# Altium PCB Finalized_21.PcbDoc
Units mm, origin at the board's own origin, x right, y up, seen from the top; angles counter-clockwise.
Board outline 52.7 x 58.93 mm, 2 copper layers (Top Layer, Bottom Layer); 11 components, 13 nets, 61 pads, 3 vias.
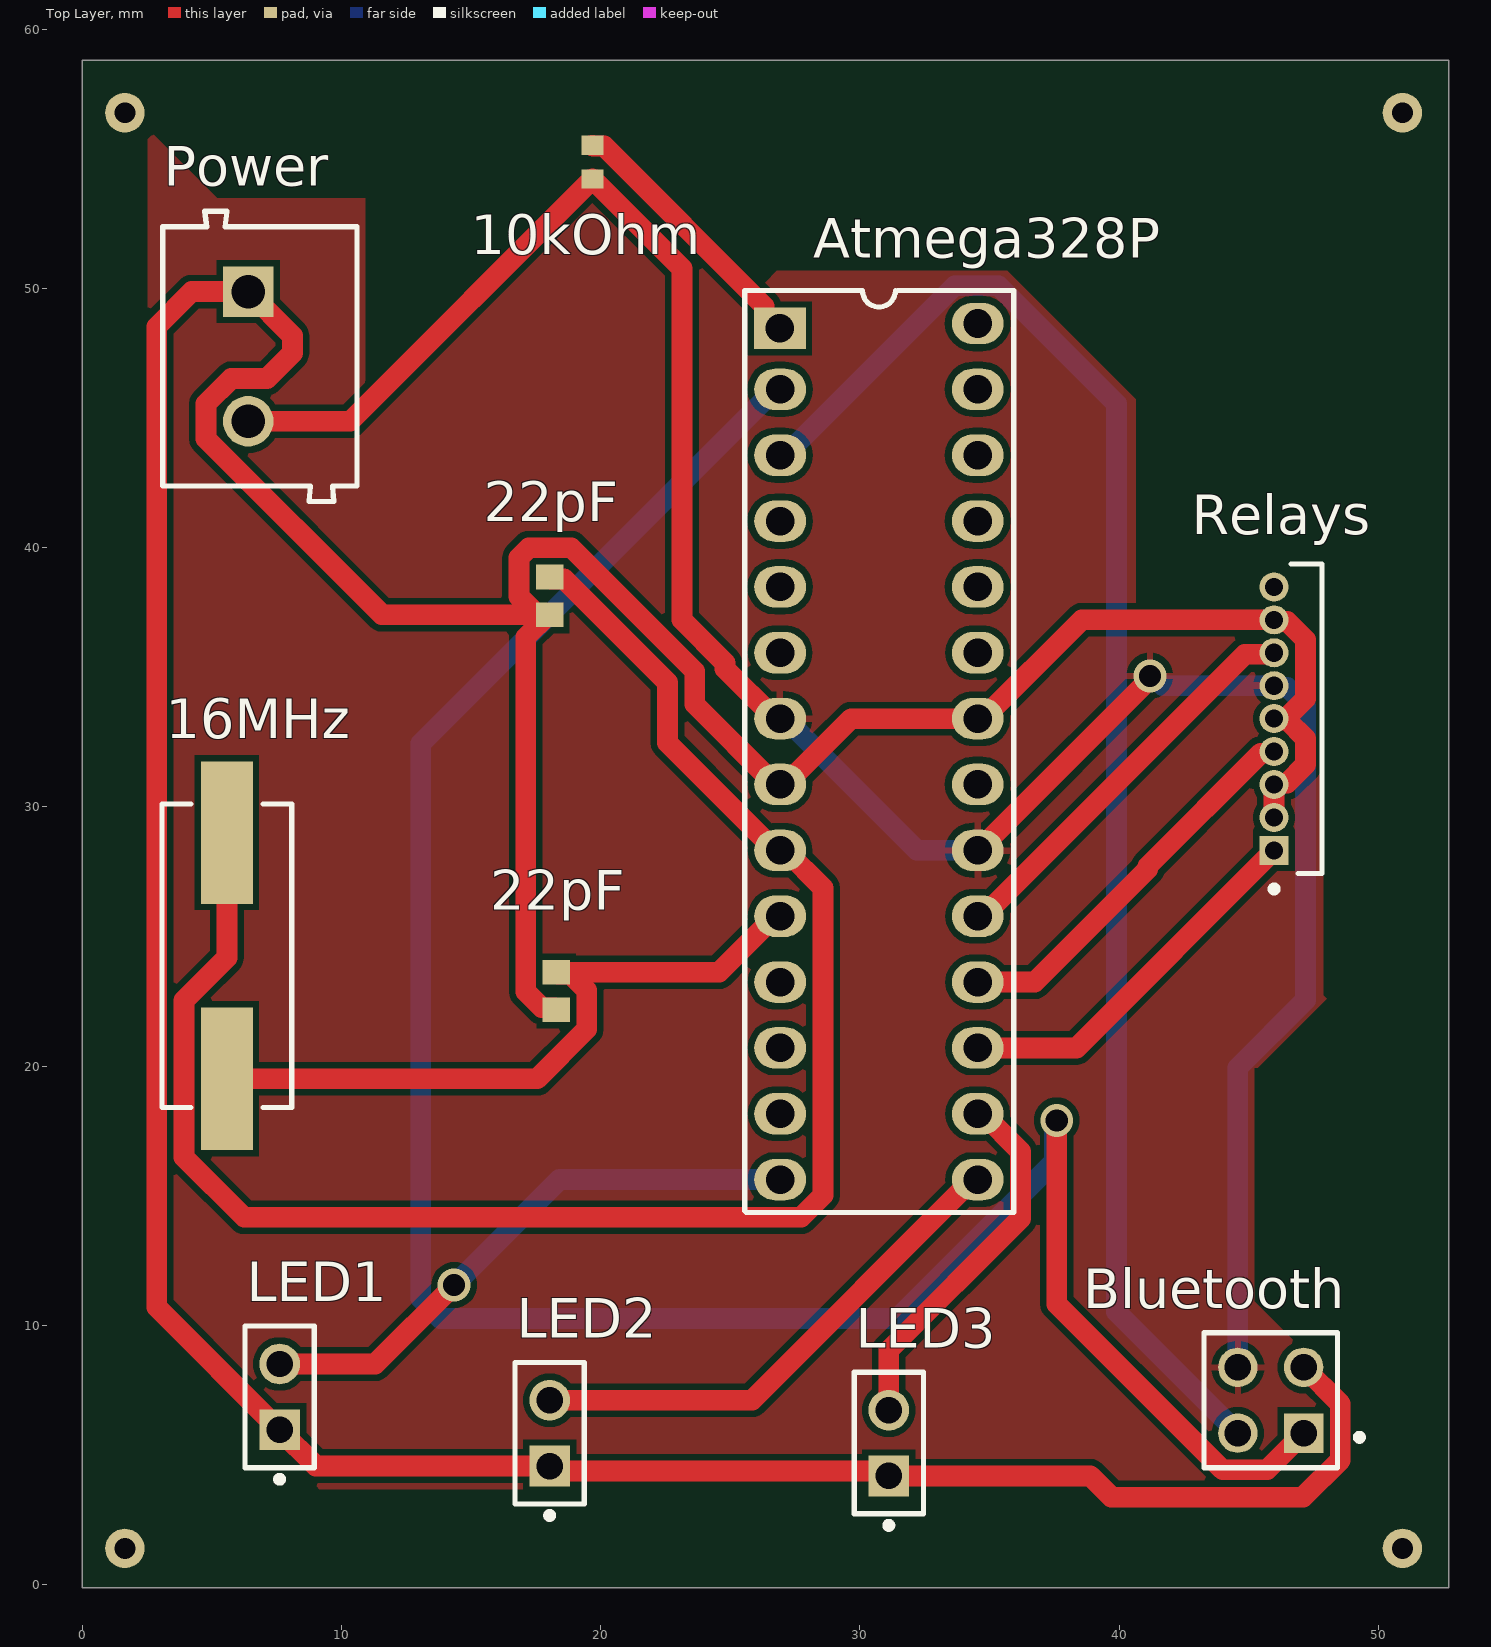
[diagram p0: Top Layer view]
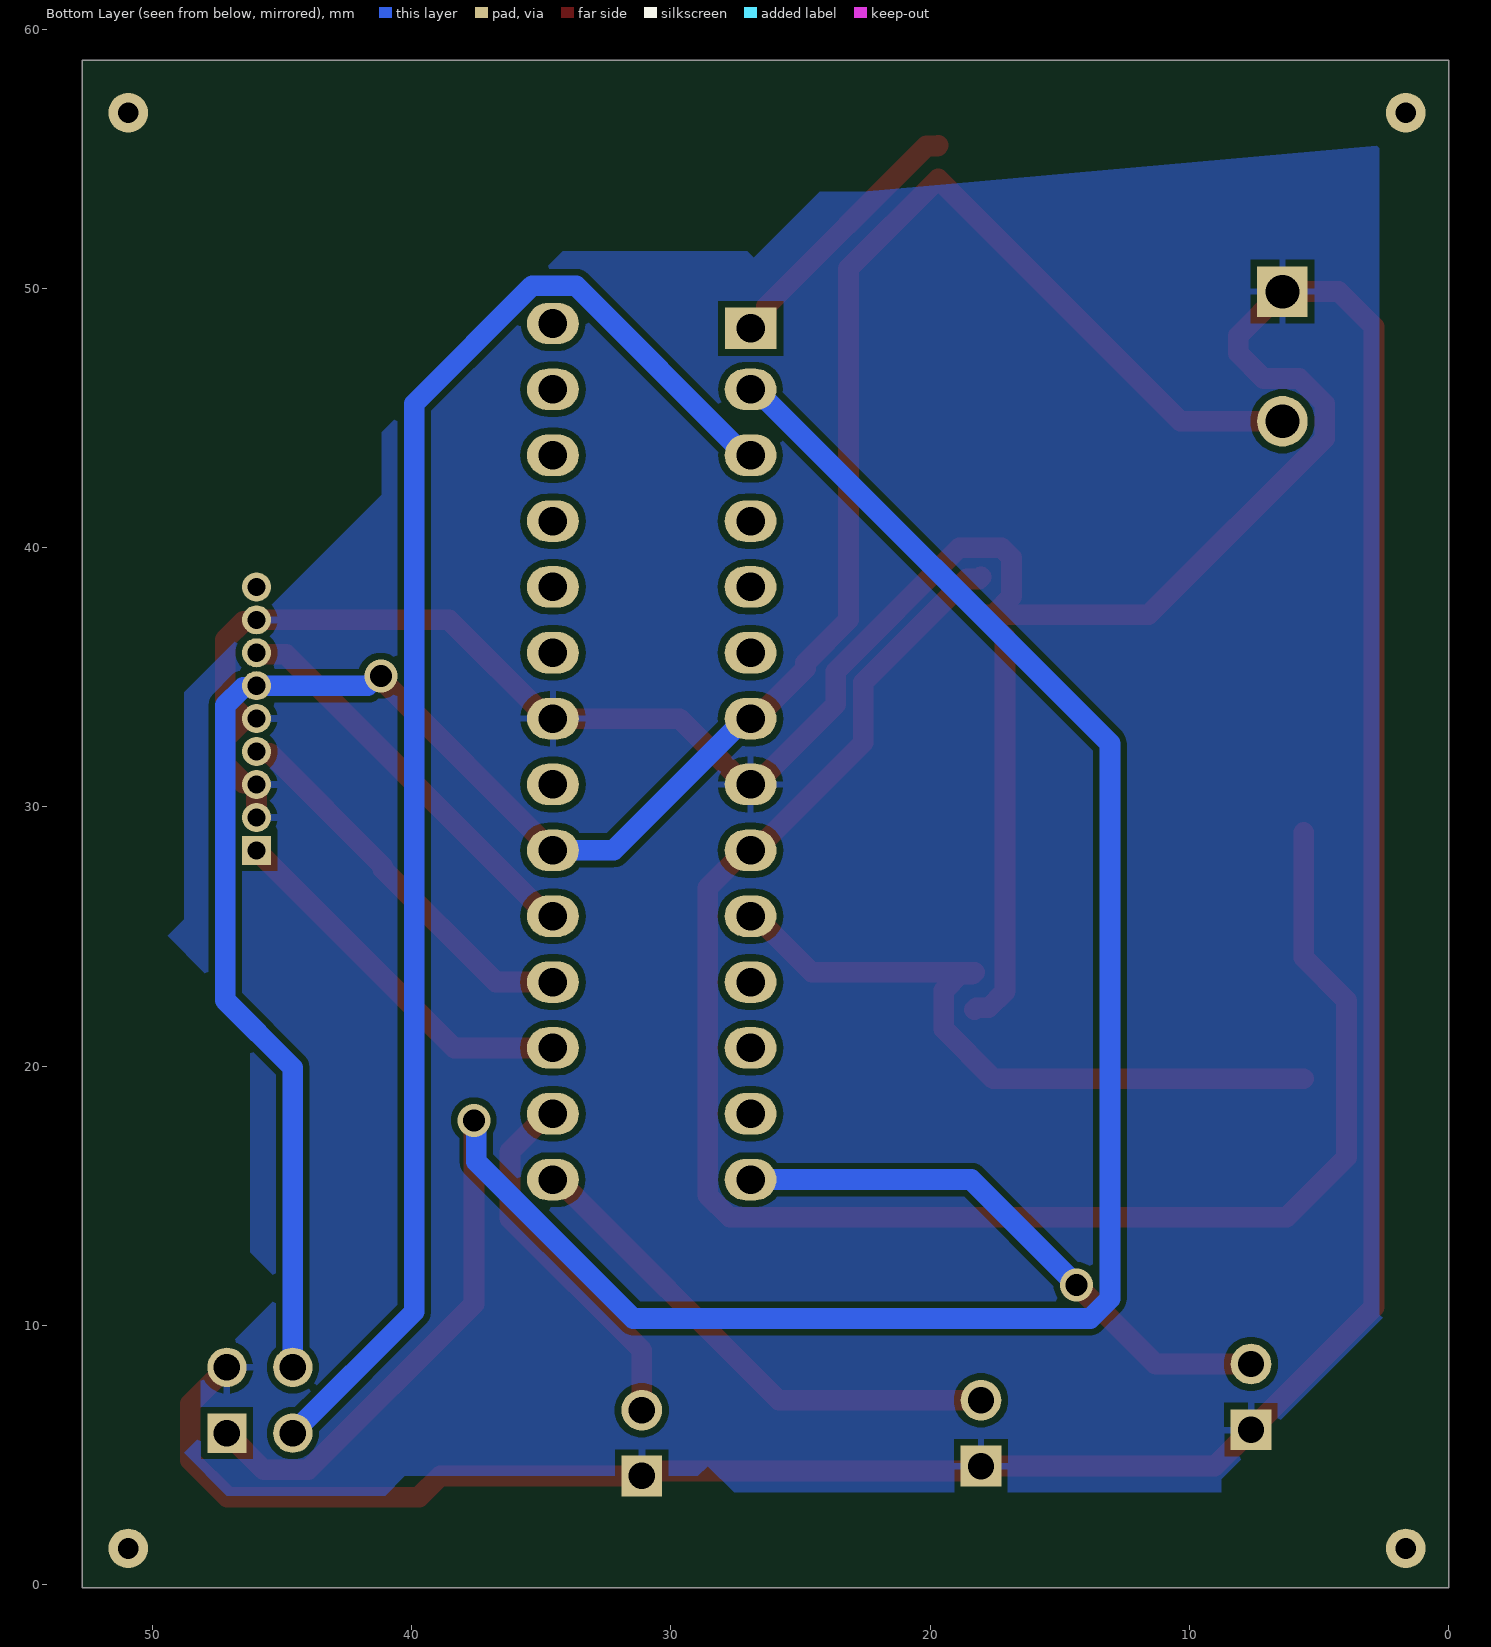
[diagram p1: Bottom Layer view, seen from below]
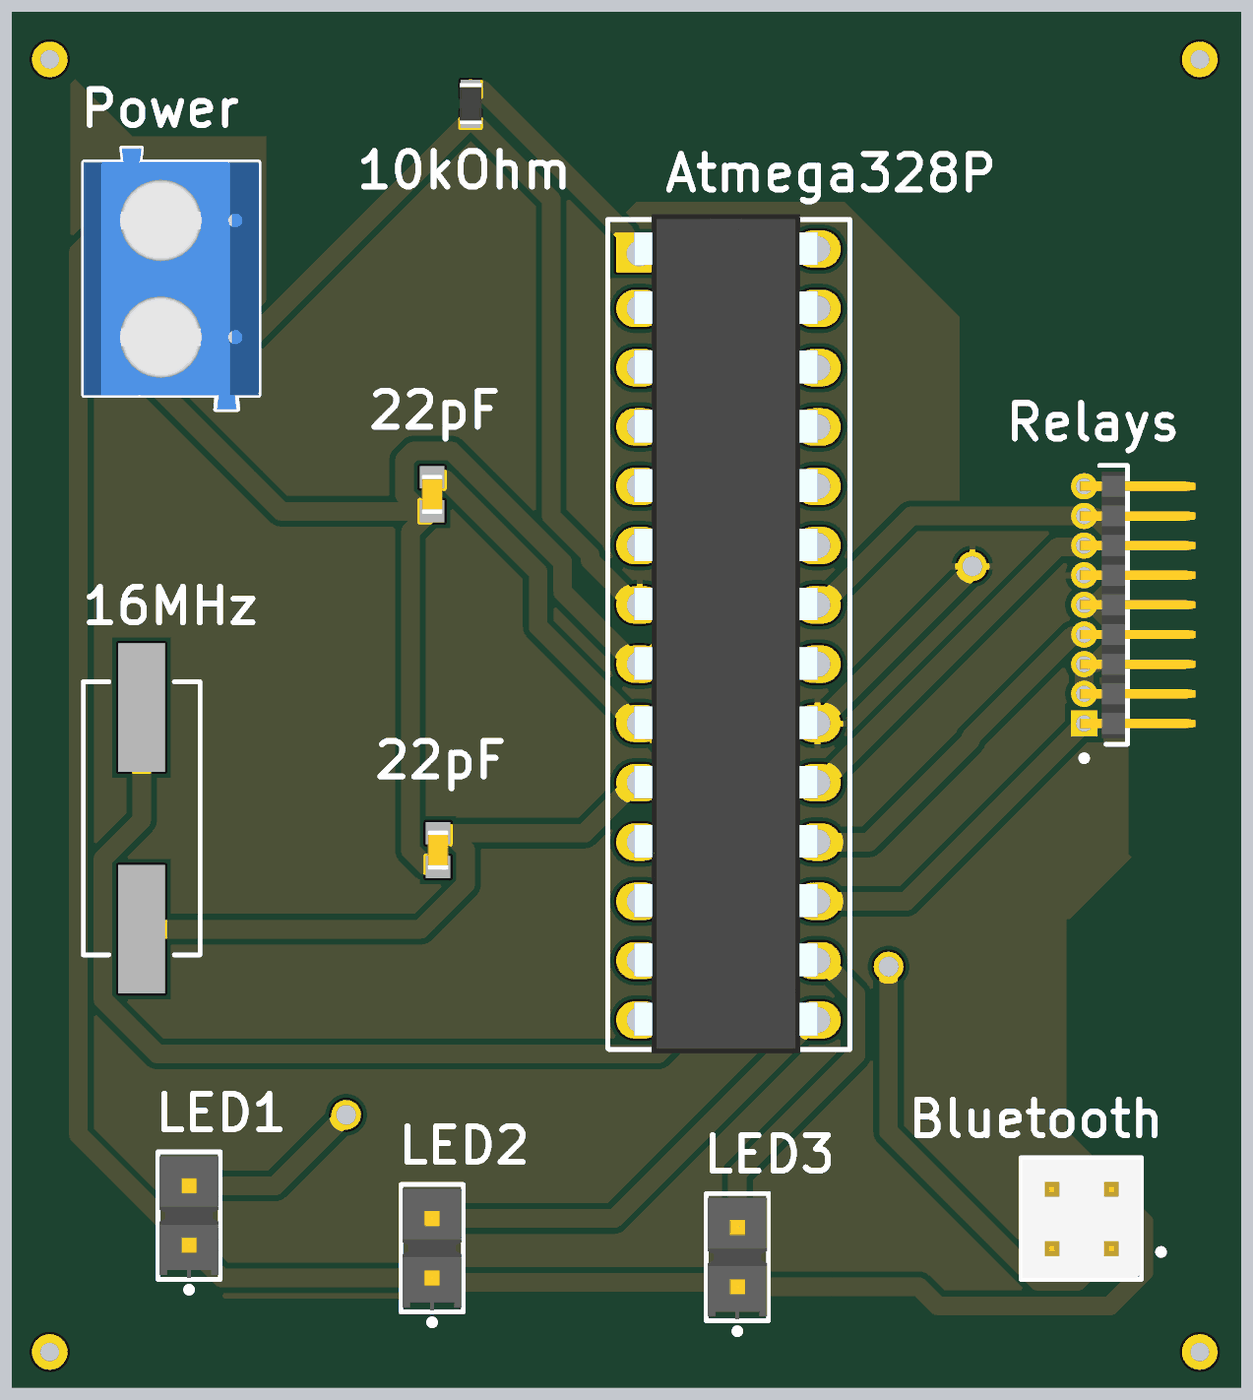
[diagram p2: 3D render of the assembled board from above, using the file's embedded part models]

## Layer stack, top to bottom
Top Solder: solder mask 0.0102, Solder Resist, Dk 3.5
Top Layer: signal copper 0.0356
Dielectric 1: dielectric 0.32, FR-4, Dk 4.8
Bottom Layer: signal copper 0.0356
Bottom Solder: solder mask 0.0102, Solder Resist, Dk 3.5

## Board outline
0,-0.127 52.705,-0.127 52.705,58.801 0,58.801

## Design rules (kind name [scope] priority, off if disabled: settings)
Clearance [All] p1: gap=0.254 ignorepadtopadclearanceinfootprint=FALSE except(0: Arc-Hole Track-Hole SMDPad-Hole THPad-Hole Via-Hole Fill-Hole Poly-Hole Region-Hole Text-Hole)
PolygonConnect [All] p1: connectstyle=Relief reliefconductorwidth=0.254 reliefentries=4 polygonreliefangle="90 Angle" airgapwidth=0.254
RoutingVias [All] p1: holewidth=1 width=1.27 viastyle="Through Hole" minholewidth=0.8 minwidth=1.27 maxholewidth=0.85 maxwidth=1.27
SolderMaskExpansion [All] p1: expansion=0.102 istentingtop=FALSE
Width [All] p1: maxlimit=1 minlimit=0.8 preferedwidth=0.8 minimp=50.000000 maximp=50.000000 favimp=50.000000
30 further rules are at their usual default settings.

## Classes and differential pairs
component class Finalized: 16MHz 22pF Bluetooth LED1 LED2 LED3 Power Relays

## Components (designator, comment, footprint, x,y, rotation, side; value= is the part's Value field where it differs from the comment)
10kOhm "ERJ3EKF1002V" RESC1609X55X30LL15T15 19.685,54.864 r90 top
16MHz "FOXSDLF/160-20" FOX-FOXSDLF160-20_V 5.588,24.257 r90 top
22pF "GRM1885C1H220JA01D" CAPC1608X90X35ML10T15 18.034,38.137 r90 top
22pF "GRM1885C1H220JA01D" CAPC1608X90X35ML10T15 18.288,22.897 r90 top
Atmega328P "ATMEGA328P-PU" 27_DIP_7.62mm 26.914,48.451 r0 top
Bluetooth "HTSW-102-07-G-D" FP-HTSW-102-07-G-D-MFG 45.847,7.112 r90 top
LED1 "TSW-102-07-F-S" FP-TSW-102-07-F-S-MFG 7.62,7.239 r90 top
LED2 "TSW-102-07-F-S" FP-TSW-102-07-F-S-MFG 18.034,5.842 r90 top
LED3 "TSW-102-07-F-S" FP-TSW-102-07-F-S-MFG 31.115,5.461 r90 top
Power "691102710002" 691102710002 6.858,47.371 r270 top
Relays "GRPB091VWCN-RC" FP-GRPB091VWCN-RC-MFG 47.231,33.401 r90 top

## Footprints (in the part's own frame and the unit in brackets; to place one, negate y for a bottom-side part, rotate by r counter-clockwise, add the part's x,y. Pads: shape width x height; smd on the part's side, far side on the other; paste and mask are expansions set on the pad)
27_DIP_7.62mm [mm]
  rect 2x1.6 hole 1.1: 1(0,0)
  oval 2x1.6 hole 1.1: 2(0.01,-2.35) 3(0.01,-4.89) 4(0.01,-7.43) 5(0.01,-9.97) 6(0.01,-12.51) 7(0.01,-15.05) 8(0.01,-17.59) 9(0.01,-20.13) 10(0.01,-22.67) 11(0.01,-25.21) 12(0.01,-27.75) 13(0.01,-30.29) 14(0.01,-32.83) 15(7.63,-32.83) 16(7.63,-30.29) 17(7.63,-27.75) 18(7.63,-25.21) 19(7.63,-22.67) 20(7.63,-20.13) 21(7.63,-17.59) 22(7.63,-15.05) 23(7.63,-12.51) 24(7.63,-9.97) 25(7.63,-7.43) 26(7.63,-4.89) 27(7.63,-2.35) 28(7.63,0.19)
  silkscreen extent -1.35,-34.1 9.02,1.46, body extent -0.23,-34.26 7.65,1.68, height 4.65
691102710002 [mm] "5,00mm - modular - blue - Horizontal entry with pressure clamp - 9,9 mm height - 02p"
  rect 1.95x1.95 hole 1.3: 1(-2.5,-0.45)
  round 1.95 hole 1.3: 2(2.5,-0.45)
  silkscreen extent -5.6,-3.75 5.6,3.75, body extent -5.6,-3.75 5.6,3.75, height 9.96
CAPC1608X90X35ML10T15 [mm] "Chip Capacitor, 2-Leads, Body 1.7x0.9mm, IPC Low Density"
  rect 0.95x1.05 smd: 1(-0.725,0) 2(0.725,0)
  body extent -0.85,-0.45 0.85,0.45, height 0.9
FOX-FOXSDLF160-20_V [mm] "SMD, 2-Leads, Body 5x11.7mm, Height 4.5mm"
  rect 5.5x2 smd: 1(-4.75,0) 2(4.75,0)
  silkscreen extent -5.85,-2.5 5.85,2.5, body extent -5.85,-2.5 5.85,2.5, height 4.5
FP-GRPB091VWCN-RC-MFG [mm]
  rect 1.12x1.12 hole 0.7 paste-1000 mask+0: 1(-5.08,1.257)
  round 1.12 hole 0.7 paste-1000 mask+0: 2(-3.81,1.257) 3(-2.54,1.257) 4(-1.27,1.257) 5(0,1.257) 6(1.27,1.257) 7(2.54,1.257) 8(3.81,1.257) 9(5.08,1.257)
  silkscreen extent -6.69,-0.6 5.97,1.38, body extent -6.07,-3.9 6.07,1.92, height 0.25
FP-HTSW-102-07-G-D-MFG [mm]
  rect 1.52x1.52 hole 1.02 paste-1000 mask+0: 1(-1.27,-1.27)
  round 1.52 hole 1.02 paste-1000 mask+0: 2(-1.27,1.27) 3(1.27,-1.27) 4(1.27,1.27)
  silkscreen extent -2.6,-3.55 2.6,2.58, body extent -2.7,-2.68 2.7,2.68, height 0.25
FP-TSW-102-07-F-S-MFG [mm]
  rect 1.57x1.57 hole 1.02 paste-1000 mask+0: 1(-1.27,0)
  round 1.57 hole 1.02 paste-1000 mask+0: 2(1.27,0)
  silkscreen extent -3.3,-1.34 2.73,1.34, body extent -2.83,-1.44 2.83,1.44, height 0.25
RESC1609X55X30LL15T15 [mm] "Chip Resistor, 2-Leads, Body 1.75x0.95mm, IPC High Density"
  rect 0.75x0.85 smd: 1(-0.65,0) 2(0.65,0)
  body extent -0.87,-0.48 0.87,0.48, height 0.55

## Part data
10kOhm: library part CMP-1012-00623-3, "Chip Resistor, 10 KOhm, +/- 1%, 0.1 W, -55 to 155 degC, 0603 (1608 Metric), RoHS, Tape and Reel", Case Code (Imperial)=0603, Case Code (Metric)=1608, Manufacturer=Panasonic, Max Operating Temperature=155degC, Max Power Dissipation=100mW, Min Operating Temperature=-55degC, Package Description="2-Pin Surface Mount Device, Body 1.6 x 0.85 mm", Package Quantity=1, Package Reference=603, Resistance=10KOhm, Temperature Coefficient=100ppm\/degreesC, Tolerance=1%, Voltage Rating=75V, Case\/Package=0603, Composition=ThickFilm, Contact Plating=Tin, Datasheet URL=https://industrial.panasonic.com/cdbs/www-data/pdf/RDA0000/AOA0000C304.pdf, Datasheet Version=02/2017, Depth=0.8mm, Height=0.45mm, Lead Free=LeadFree, Length=1.6mm, Manufacturer URL=http://www.panasonic.com/, Military Standard=Not, Mount=SurfaceMount, Mounting Technology=SurfaceMount, Number of Pins=2, Number of Terminations=2, Packaging=TapeandReel, Power Rating=100mW, Radiation Hardening=No, REACH SVHC=NoSVHC, RoHSCompliant=true, Termination=SMD/SMT, Voltage Rating (DC)=75V, Width=0.031inch
16MHz: library part CMP-1749-00001-1, "Resistance Weld SMD Crystal, 16 MHz, +/- 30 ppm, 20 pF, -20 to 70 degC, 2-Pin SMD, RoHS, Tape and Reel", Case\Package=SOT-553-6, Max Operating Temperature="150 degC", Max Supply Voltage="3.3 V", Max Supply Voltage (DC)="6 V", Min Operating Temperature="-55 degC", Min Supply Voltage="1.4 V", Min Supply Voltage (DC)="4 V", Output Current="3 mA", Package Quantity=1, ComponentLink1Description="Manufacturer URL", ComponentLink1URL=http://www.foxonline.com/, ComponentLink2Description=Datasheet, ComponentLink2URL=http://foxonline.com/pdfs/hc49sdlf.pdf, DatasheetVersion=Mar-15, Height="0.55 mm", Interface=I2C, Length="1.6 mm", Mount="Surface Mount", PackageDescription="2-Pin Surface Mount Device, Body 5 x 11.7 mm, Height 4.5 mm", PackageReference=FOX-FOXSDLF160-20, Packaging="Cut Tape", Pins=6, Radiation Hardening=No, REACH SVHC="No SVHC", RoHSCompliant=true, Weight="9.9E-05 oz", Width="1.2 mm"
22pF 22pF: library part CMP-2000-04945-1, "Chip Capacitor, 22 pF, +/- 5%, 50 V, -55 to 125 degC, 0603 (1608 Metric), RoHS, Tape and Reel", Capacitance=22pF, Case Size/Dimension=0603, Dielectric=C0G, Manufacturer=Murata, Package Description="2-Pin Surface Mount Device, Body 1.6 x 0.8 mm", Package Reference=603, Rated Voltage=50V, Tolerance (%)=±5%, Datasheet URL=https://datasheet.ciiva.com/11786/0900766b807a1cab-11786398.pdf, Datasheet Version=Jul-06, Manufacturer URL=http://www.murata.com/
Atmega328P: "ATMEGA328P-PU; 8 bit Microcontroller AVR 20MHz 1; 32kb Flash; 2kb RAM; I2C SPI 2", Case/Package=PDIP, Frequency=20MHz, Manufacturer="Microchip / Atmel", Max Operating Temperature=85°C, Max Supply Voltage=5.5V, Min Operating Temperature=-40°C, Min Supply Voltage=1.8V, Package Quantity=14, Supplier Part Number 1=ATMEGA328P-PU-ND, Category=Microcontrollers, ComponentLink1Description=https://datasheet.ciiva.com/20168/73-4283-20168380.pdf?src-supplier=Rapid+Electronics, ComponentLink1URL=https://datasheet.ciiva.com/20168/73-4283-20168380.pdf?src-supplier=Rapid+Electronics, ComponentLink2Description=https://datasheet.ciiva.com/19457/2139111-19457070.pdf?src-supplier=Jameco, ComponentLink2URL=https://datasheet.ciiva.com/19457/2139111-19457070.pdf?src-supplier=Jameco, ComponentLink3Description=https://datasheet.ciiva.com/1157/1684409-1157696.pdf?src-supplier=Element14, ComponentLink3URL=https://datasheet.ciiva.com/1157/1684409-1157696.pdf?src-supplier=Element14, ComponentLink4Description=https://datasheet.ciiva.com/26818/atmega328p-pu-26818578.pdf?src-supplier=IIIC, ComponentLink4URL=https://datasheet.ciiva.com/26818/atmega328p-pu-26818578.pdf?src-supplier=IIIC, ComponentLink5Description=https://datasheet.ciiva.com/29119/155197-da-01-en-microcontr-atmega328p-pu-8bit-pdip-28-29119593.pdf?src-supplier=Conrad, ComponentLink5URL=https://datasheet.ciiva.com/29119/155197-da-01-en-microcontr-atmega328p-pu-8bit-pdip-28-29119593.pdf?src-supplier=Conrad, ComponentLink6Description=https://datasheet.ciiva.com/15213/getdatasheetpartid-318533-15213133.pdf?src-supplier=Verical, ComponentLink6URL=https://datasheet.ciiva.com/15213/getdatasheetpartid-318533-15213133.pdf?src-supplier=Verical, Contact Plating=Tin,Matte, Core Architecture=AVR, Data Bus Width=8b, Height=3.28mm, Interface=I2C,SPI,UART,USART,2-Wire, Lead Free="Lead Free", Length=37.4mm, Manufacturer Part Number=ATMEGA328P-PU, Max Frequency=20MHz, Memory Size=32KB, Memory Type=FLASH, Mount="Through Hole", Number of ADC Channels=6, Number of I2C Channels=1, Number of I/Os=23, Number of Pins=28, Number of Programmable I/O=23, Number of PWM Channels=6, Number of SPI Channels=1, Number of Timers/Counters=3, Oscillator Type=Internal, Packaging=Rail/Tube, Peripherals="Brown-out Detect/Reset,POR,PWM,WDT", Pricing 1="1=2,08000, 25=1,91000, 100=1,73000 (USD)", Radiation Hardening=No, RAM Size=2KB, REACH SVHC="No SVHC", RoHS=Yes, Stock 1=5280, Supplier 1=Digi-Key, Watchdog Timer=Yes, Width=6.76mm
Bluetooth: library part CMP-02766-000010-1, "CONN HEADER VERT 4POS 2.54MM", Current Rating=6.3A, Manufacturer=Samtec, Temperature="-55°C to +125°C", Temperature Range High=+125°C, Temperature Range Low=-55°C, Voltage Rating=550V, Automotive=No, Category=Conn, ComponentLink2Description=Datasheet, ComponentLink2URL=http://suddendocs.samtec.com/catalog_english/htsw_th.pdf, Conn Gender=Male, Conn Orientation=Straight, Contact Material=Gold,Nickel, Device Class L1=Connectors, Device Class L2="Headers and Wire Housings", Device Class L3=unset, Digikey Description="CONN HEADER VERT 4POS 2.54MM", Height=8.71mm, Lead Free=Yes, Manufacturer Part Number=HTSW-102-07-G-D, Mouser Description="Conn Unshrouded Header HDR 4 POS 2.54mm Solder ST Thru-Hole Bag", Number Of Contacts=4, Number Of Rows=2, Octopart=https://octopart.com/htsw-102-07-g-d-samtec-10531767, Package=HTSW-102-07-G-D, Pitch=2.54mm, RoHS=TRUE
LED1 LED2 LED3: library part CMP-02766-001458-1, "CONN HEADER VERT 2POS 2.54MM", Color=Black, Flammability Rating="UL94 V-0", Max Current Rating=7.6A, Max Operating Temperature=125°C, Max Voltage Rating (AC)=550V, Min Operating Temperature=-55°C, Package Quantity=1, Connector Type=Header, Contact Finish - Mating=GOLD, Contact Material=Bronze, Contact Mating Length=0.23inch, Contact Plating=Gold, Contact Shape=Square, Contact Type="Male Pin", Depth=2.54mm, Fastening Type=Pull, Gender=Male, Housing Color=Black, Housing Material=Polyester, Insulation Color=Black, Insulation Material=PBT, Length=5.08mm, Mount="Through Hole", Number Of Contacts=2, Number of Positions=2, Number Of Rows=1, Orientation=Straight, Packaging=Bulk, Pitch=2.54mm, Radiation Hardening=No, REACH SVHC="No SVHC", RoHS Compliant=Yes, Series=TSW, Termination=Solder
Power: library part CMP-1502-03258-1, "Series 102 - 5.00 mm Horizontal Entry Modular with Pressure Clamp WR-TBL, 2 pin", Manufacturer="Wurth Elektronik", Operating Temperature=-40to105degC, Datasheet URL=http://katalog.we-online.de/em/datasheet/6911027100xx.pdf, Manufacturer URL=http://www.we-online.de, Mounting Technology=THT, Package Reference=691102710002, Packaging=Box, Part Number=691102710002, Pin Number=2, Pitch=5.00mm, Publisher=WurthElektronik
Relays: library part CMP-25680-000033-1, "CONN HEADER R/A 9POS 1.27MM", Package Quantity=1, Connector Type="Male Pin", Contact Mating Length=0.118inch, Contact Plating=Gold, Contact Type="Male Pin", Lead Free="Lead Free", Mount="Through Hole", Number of Positions=9, Number Of Rows=1, Packaging=Bulk, Pitch=0.05inch, Termination=Solder

## Free pads (board coordinates)
  round 1.524 hole 0.8: 14(1.651,56.769) 20(1.651,1.397) 21(50.927,1.397) 22(50.927,56.769)

## Via types
v1: diameter 1.27, hole 0.85, Top Layer to Bottom Layer, 3 vias

## Nets (pads, with @x,y where several pads share a name; then routed paths per layer and width w, separated by ;. In a path a pad name is that pad's centre, name@x,y a point inside that pad or via, vN(x,y) a via of type N, cw(c..) or ccw(c..) an arc to the next point about the centre after c; other vN are vias at no path point)
GND: 22pF.1 Atmega328P.8 Atmega328P.22 Bluetooth.3 LED1.1 LED2.1 LED3.1 Power.1 Relays.2 Relays.3 Relays.5 Relays.8 | length 184.7
  Top Layer w0.8: 17.484,37.487 16.855,38.116 16.855,39.608 17.238,39.991 18.87,39.991 23.631,35.23 23.631,33.954 26.724,30.861 Atmega328P.8 27.124,30.861 29.664,33.401 Atmega328P.22 34.744,33.401 38.554,37.211 Relays.8 46.035,37.15 46.482,37.15 47.188,36.444 47.188,34.168 Relays.5@46.482,33.462 ; 22pF.1@18.288,22.172 18.213,22.247 17.738,22.247 17.109,22.876 17.109,36.537 17.984,37.412 11.563,37.412 4.779,44.196 4.779,45.546 5.757,46.524 7.136,46.524 8.114,47.502 8.114,48.165 Power.1 4.233,49.871 2.88,48.518 2.88,10.709 LED1.1 9.017,4.572 LED2.1 18.224,4.381 30.924,4.381 LED3.1 38.888,4.191 39.705,3.374 47.094,3.374 48.531,4.811 48.531,6.968 Bluetooth.3 ; Relays.2 Relays.3 ; Relays.5 46.035,33.34 46.482,33.34 47.188,32.634 47.188,31.628 Relays.3@46.482,30.922
Net10kOhm_2: 10kOhm.2 Atmega328P.1 | length 10.4
  Top Layer w0.8: 10kOhm.2 19.71,55.489 20.135,55.489 26.314,49.31 26.314,48.851 26.714,48.451 Atmega328P.1
Net16MHz_1: 16MHz.1 22pF.2@18.288,23.622 Atmega328P.10 | length 27.2
  Top Layer w0.8: 16MHz.1 17.548,19.507 19.467,21.426 19.467,22.918 18.838,23.547 18.363,23.547 18.288,23.622 24.565,23.622 26.724,25.781 Atmega328P.10
Net16MHz_2: 16MHz.2 22pF.2@18.034,38.862 Atmega328P.9 | length 67.9
  Top Layer w0.8: 16MHz.2 5.588,24.182 3.934,22.528 3.934,16.486 6.253,14.167 27.726,14.167 28.578,15.019 28.578,26.867 27.124,28.321 Atmega328P.9 26.724,28.321 22.577,32.468 22.577,34.793 18.584,38.787 18.109,38.787 22pF.2@18.034,38.862
NetAtmega328P_2: Atmega328P.2 Bluetooth.1 | length 89.7
  Top Layer w0.8: v1(37.592,17.907) 37.592,10.827 43.991,4.428 45.703,4.428 Bluetooth.1
  Bottom Layer w0.8: Atmega328P.2 26.724,46.101 13.062,32.439 13.062,11.023 13.817,10.268 31.447,10.268 37.502,16.323 37.502,17.817 v1(37.592,17.907)
NetAtmega328P_3: Atmega328P.3 Bluetooth.2 | length 59.2
  Bottom Layer w0.8: Atmega328P.3 27.124,43.561 33.658,50.095 35.346,50.095 39.893,45.549 39.893,10.526 Bluetooth.2
NetAtmega328P_14: Atmega328P.14 LED1.2 | length 22.2
  Top Layer w0.8: LED1.2 11.303,8.509 v1(14.351,11.557)
  Bottom Layer w0.8: v1(14.351,11.557) 18.415,15.621 Atmega328P.14
NetAtmega328P_15: Atmega328P.15 LED2.2 | length 20
  Top Layer w0.8: LED2.2 25.835,7.112 34.344,15.621 Atmega328P.15
NetAtmega328P_16: Atmega328P.16 LED3.2 | length 14.3
  Top Layer w0.8: LED3.2 31.115,9.04 36.198,14.123 36.198,16.707 34.744,18.161 Atmega328P.16
NetAtmega328P_17: Atmega328P.17 Relays.1 | length 14.6
  Top Layer w0.8: Atmega328P.17 38.354,20.701 Relays.1
NetAtmega328P_18: Atmega328P.18 Relays.4 | length 15.2
  Top Layer w0.8: Atmega328P.18 36.744,23.241 41.105,27.602 41.105,27.709 45.466,32.07 45.913,32.07 Relays.4
NetAtmega328P_19: Atmega328P.19 Relays.7 | length 15.6
  Top Layer w0.8: Atmega328P.19 34.744,25.781 44.843,35.88 45.913,35.88 Relays.7
VCC: 10kOhm.1 Atmega328P.7 Atmega328P.20 Bluetooth.4 Power.2 Relays.6 | length 92.9
  Top Layer w0.8: Power.2 10.342,44.871 10kOhm.1 23.14,50.759 23.14,37.212 24.802,35.55 24.802,35.323 26.724,33.401 Atmega328P.7 ; Atmega328P.20 34.578,28.321 41.182,34.925 v1(41.182,35.052)
  Bottom Layer w0.8: Atmega328P.7 27.124,33.401 32.204,28.321 Atmega328P.20 ; v1(41.182,35.052) 41.309,35.052 41.69,34.671 Relays.6 ; Bluetooth.4 44.577,19.935 47.188,22.546 47.188,33.904 Relays.6@46.482,34.61
pads on no net: Atmega328P.4 Atmega328P.5 Atmega328P.6 Atmega328P.11 Atmega328P.12 Atmega328P.13 Atmega328P.21 Atmega328P.23 Atmega328P.24 Atmega328P.25 Atmega328P.26 Atmega328P.27 Atmega328P.28 Relays.9

## Polygon pours and split planes (outlines as drawn)
VCC on Top Layer "VCC_L01_P000" (solid, pour order 0): 2.54,55.753 2.54,10.287 9.144,3.683 38.735,3.683 39.624,2.794 47.752,2.794 47.752,3.302 49.403,4.953 49.149,5.207 49.149,7.366 48.768,7.366 45.212,10.922 45.212,19.939 45.339,19.939 48.006,22.606 47.879,22.733 47.879,36.576 47.625,36.576 46.228,37.973 45.847,37.592 40.64,37.592 40.64,45.72 35.687,50.673 26.797,50.673 26.289,50.165 20.447,56.007 18.415,56.007 18.542,55.88 18.542,54.102 10.922,46.482 10.922,53.467 5.207,53.467 2.667,56.007 2.667,55.88
GND on Bottom Layer "GND_L02_P001" (solid, pour order 1): 2.667,55.499 2.667,10.414 2.54,10.287 8.763,4.064 8.763,3.556 27.559,3.556 28.575,4.572 28.956,4.191 40.259,4.191 41.021,3.429 47.117,3.429 48.768,5.08 48.133,5.715 48.133,8.128 44.831,11.43 46.228,12.827 46.228,21.844 49.403,25.019 48.768,25.654 48.768,34.417 41.148,42.037 41.148,44.45 34.163,51.435 27.051,51.435 26.797,51.181 24.257,53.721 22.606,53.721